# Altium PCB EVB_MBD_AK376xE_V1.0.0.PcbDoc (part 2 of 5)
Units mil, origin at the board's own origin, x right, y up, seen from the top; angles counter-clockwise.
Board outline 7060.01 x 5460.01 mil, 4 copper layers (Top, Layer 1, Layer 2, Bottom), stack 5.512 mil thick; 344 components, 305 nets, 1421 pads, 1325 vias.
Unrouted connection lines stored in the file: 947.
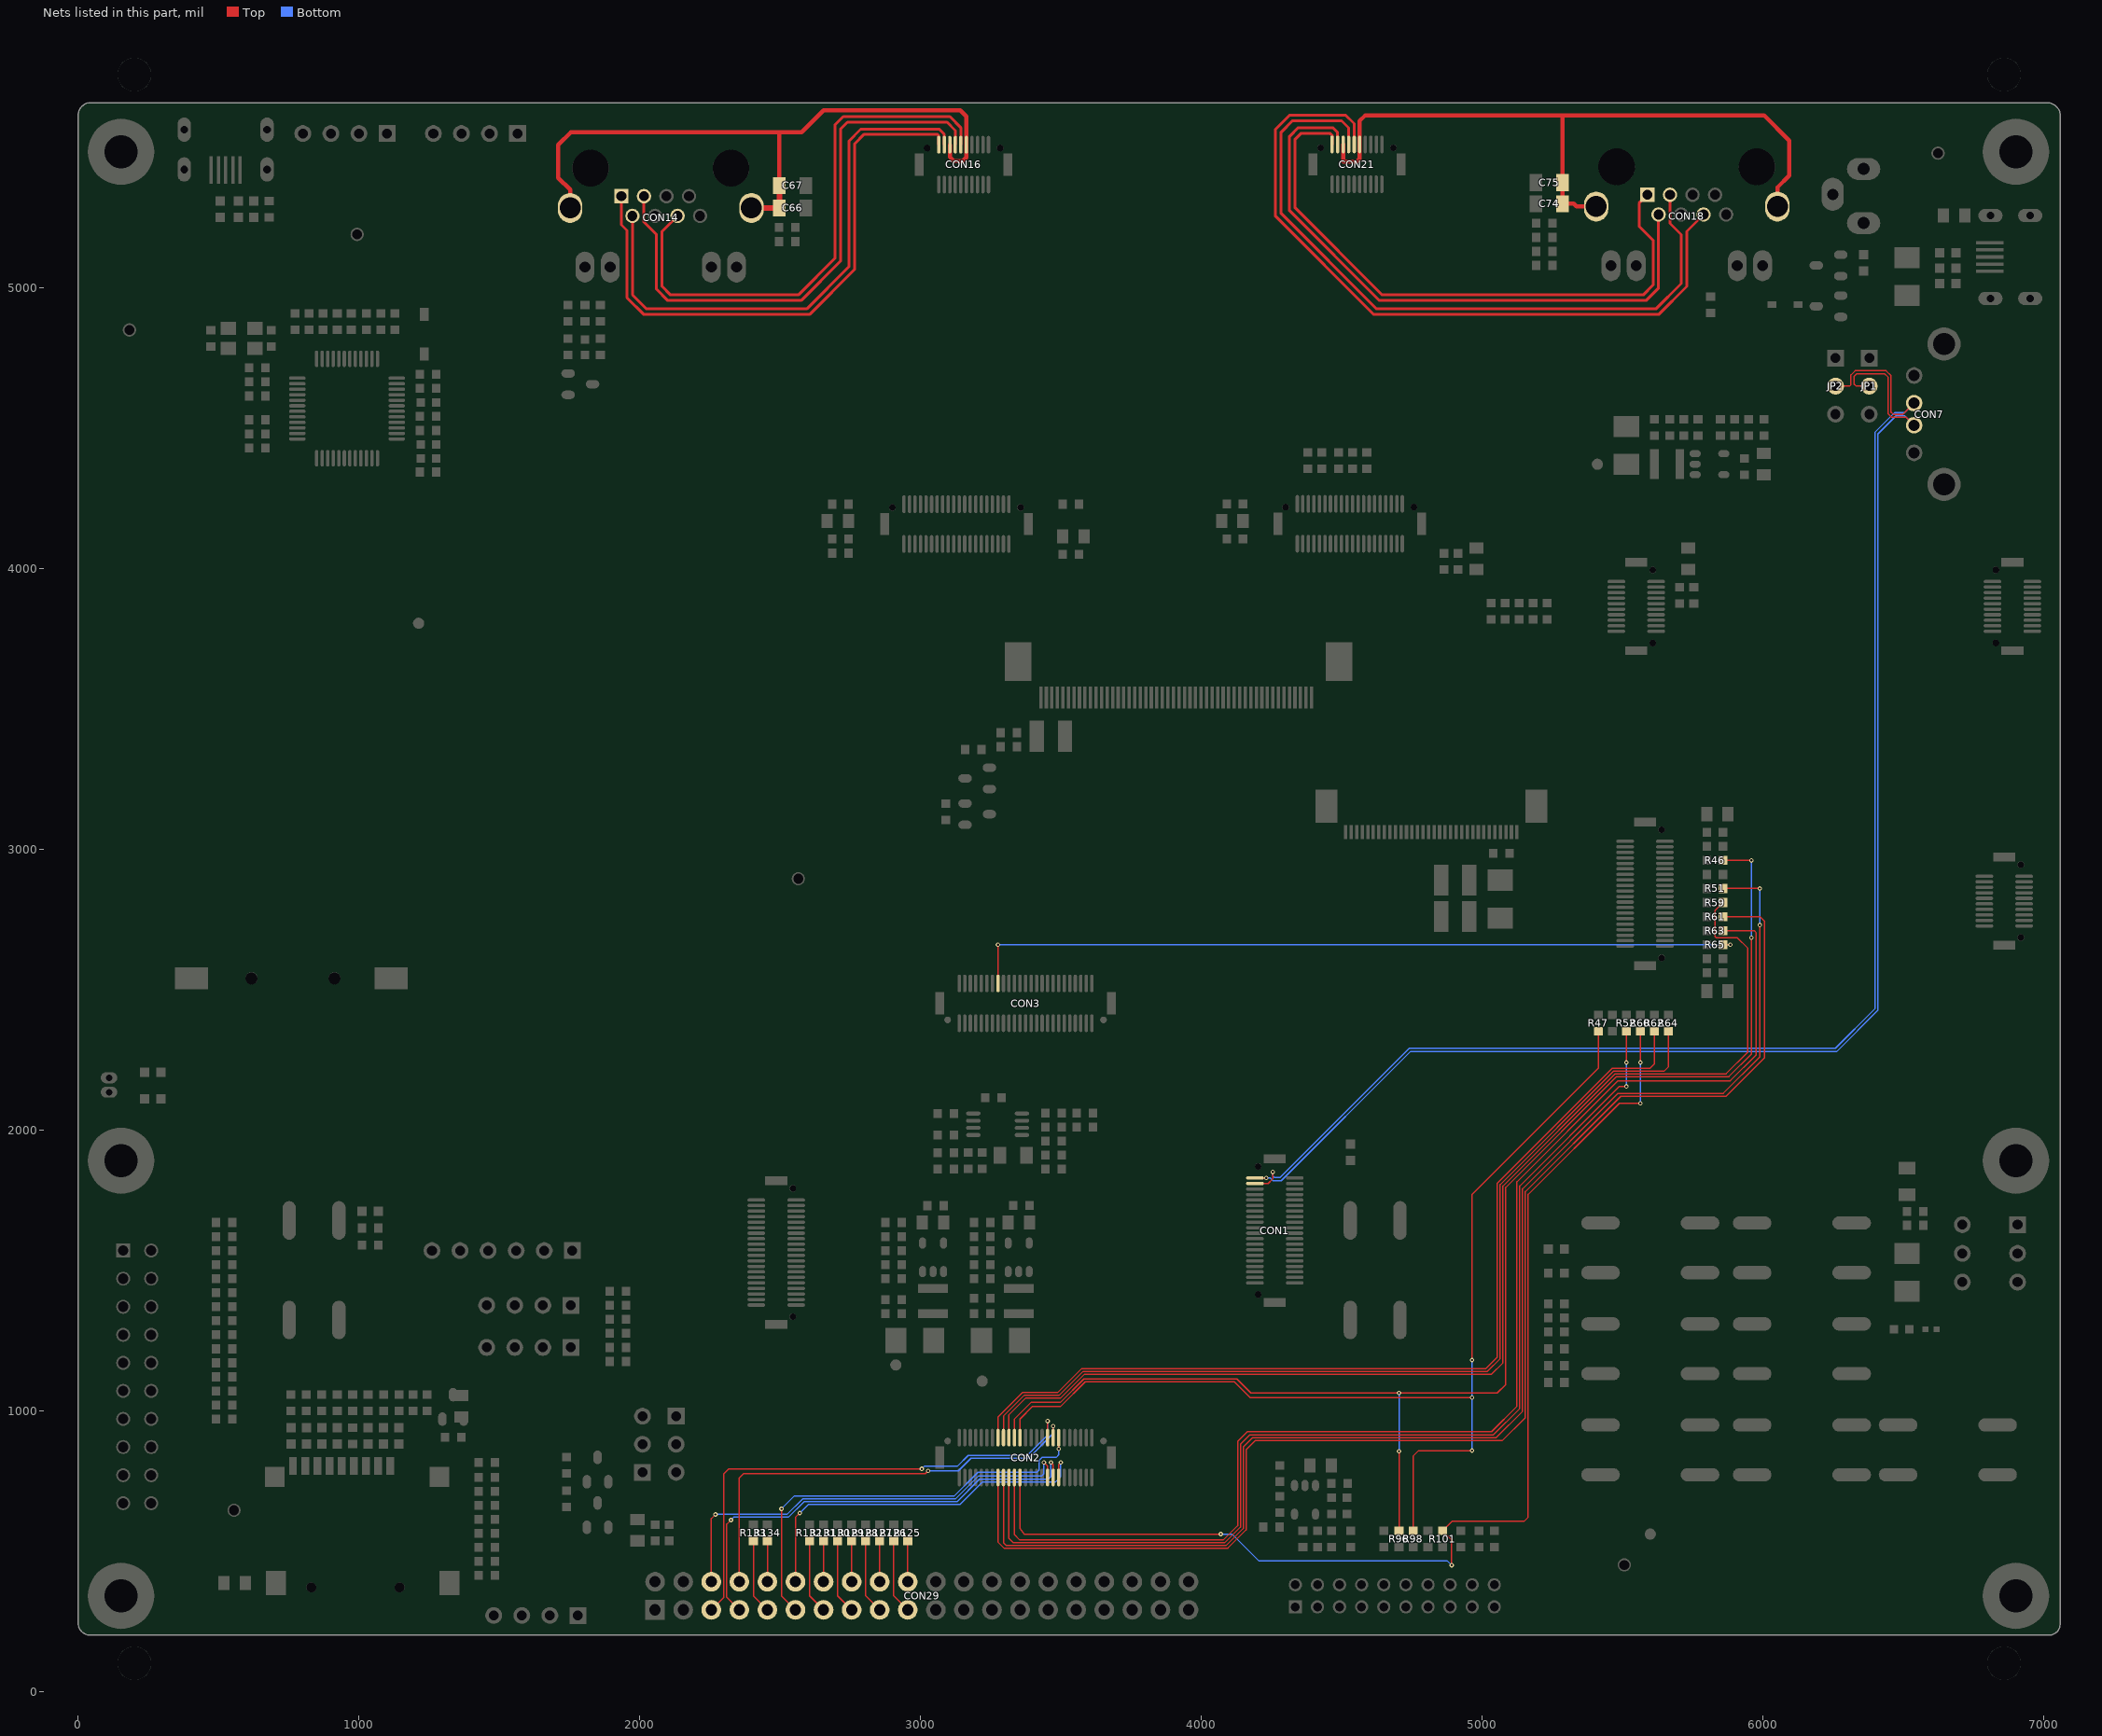
[diagram p4: the nets of this part, all layers, seen from the top]

## Footprints (in the part's own frame and the unit in brackets; to place one, negate y for a bottom-side part, rotate by r counter-clockwise, add the part's x,y. Pads: shape width x height; smd on the part's side, far side on the other; paste and mask are expansions set on the pad) (continued)
FileName=\\172.10.10.37\部门文件夹\系统平台研发中心\系统硬件部\AD_Library\\AD_Footprint.PcbLib#8 [mm]
  oval 2x3 hole 1.1 slot 1.7 at 90 deg: 1(10.9,0) 2(6,0)
  oval 3x2 hole 1 slot 1.7 at 0 deg: 3(8.3,-2.8)
  silkscreen extent 0,-2.5 10.9,2.5
FileName=\\172.10.10.37\部门文件夹\系统平台研发中心\系统硬件部\AD_Library\\AD_Footprint.PcbLib#9 [mm]
  rect 0.3x2.5 smd: 1(-1.3,-0.25) 2(-0.65,-0.25) 3(0,-0.25) 4(0.65,-0.25) 5(1.3,-0.25)
  oval 1.2x2.2 hole 0.7 slot 1.5 at 90 deg: 6(3.75,-0.3) 7(3.75,-3.9) 8(-3.75,-3.9) 9(-3.75,-0.3)
  silkscreen extent -3.8,-6.4 3.8,0
FileName=\\172.10.10.37\部门文件夹\系统平台研发中心\系统硬件部\AD_Library\\AD_Footprint.PcbLib#10 [mm]
  round 1.5 / inner round 1.5 / far side round 1.7 hole 1: 1(3.5,0) 2(1,0) 3(-1,0) 4(-3.5,0)
  round 3 hole 2: 5(-6.35,2.7) 6(6.35,2.7)
  silkscreen extent -6.3,-1.75 6.35,13
FileName=\\172.10.10.37\部门文件夹\系统平台研发中心\系统硬件部\AD_Library\\AD_Footprint.PcbLib#11 [mm]
  rect 0.7x1.6 smd: 1(3.15,11) 2(2.05,11) 3(0.95,11) 4(-0.15,11) 5(-1.25,11) 6(-2.35,11) 7(-3.45,11) 8(-4.55,11) 9(-5.65,11)
  rect 1.8x1.8 smd: 10(-7.3,10)
  rrect0% 1.8x1.8 smd: 11(7.6,10)
  rect 1.8x2.2 smd: 12(8.5,0.4) 13(-7.2,0.4)
  round 0.9 hole 0.9 unplated: 14(-4,0) 15(4,0)
  silkscreen extent -6.4,-6.3 8.3,10.5
FileName=\\172.10.10.37\部门文件夹\系统平台研发中心\系统硬件部\AD_Library\\AD_Footprint.PcbLib#12 [mm]
  oval 1x1.5 hole 0.6 slot 0.9 at 90 deg: 1(-0.65,-0.5) 2(0.65,-0.5)
  silkscreen extent -2.3,-1.7 2.2,2
FileName=\\172.10.10.37\部门文件夹\系统平台研发中心\系统硬件部\AD_Library\\AD_Footprint.PcbLib#13 [mm]
  rect 1.3x1.3 / inner round 1.3 / far side rect 1.3x1.3 hole 0.9: 1(3.56,-6.897)
  round 1.3 hole 0.9: 2(2.56,-5.117) 3(1.52,-6.897) 4(0.52,-5.117) 5(-0.52,-6.897) 6(-1.52,-5.117) 7(-2.56,-6.897) 8(-3.56,-5.117)
  oval 2.2x2.7 hole 1.9 slot 2.2 at 90 deg: 9(8.2,-5.837) 10(-8.2,-5.837)
  round 3.3 hole 3.3 unplated: 11(6.35,-9.437) 12(-6.35,-9.437)
  oval 1.7x2.8 hole 1 slot 1.5 at 90 deg: 13(6.86,-0.487) 14(4.57,-0.487) 15(-4.57,-0.487) 16(-6.86,-0.487)
  silkscreen extent -8.2,-14.94 8.2,1.06
FileName=\\172.10.10.37\部门文件夹\系统平台研发中心\系统硬件部\AD_Library\\AD_Footprint.PcbLib#14 [mm]
  oval 0.3x1.6 smd: 1(-2.25,-1.8) 2(-2.25,1.8) 3(-1.75,-1.8) 4(-1.75,1.8) 5(-1.25,-1.8) 6(-1.25,1.8) 7(-0.75,-1.8) 8(-0.75,1.8) 9(-0.25,-1.8) 10(-0.25,1.8) 11(0.25,-1.8) 12(0.25,1.8) 13(0.75,-1.8) 14(0.75,1.8) 15(1.25,-1.8) 16(1.25,1.8) 17(1.75,-1.8) 18(1.75,1.8) 19(2.25,-1.8) 20(2.25,1.8)
  rect 0.8x2 smd: 21(-4,0) 22(4,0)
  round 0.6 hole 0.6 unplated: 23(-3.3,1.5) 24(3.3,1.5)
  silkscreen extent -4.5,-2.5 4.5,1.8
FileName=\\172.10.10.37\部门文件夹\系统平台研发中心\系统硬件部\AD_Library\\AD_Footprint.PcbLib#15 [mm]
  rect 0.3x1.25 smd: 1(7.75,1) 2(7.25,1) 3(6.75,1) 4(6.25,1) 5(5.75,1) 6(5.25,1) 7(4.75,1) 8(4.25,1) 9(3.75,1) 10(3.25,1) 11(2.75,1) 12(2.25,1) 13(1.75,1) 14(1.25,1) 15(0.75,1) 16(0.25,1) 17(-0.25,1) 18(-0.75,1) 19(-1.25,1) 20(-1.75,1) 21(-2.25,1) 22(-2.75,1) 23(-3.25,1) 24(-3.75,1) 25(-4.25,1) 26(-4.75,1) 27(-5.25,1) 28(-5.75,1) 29(-6.25,1) 30(-6.75,1) 31(-7.25,1) 32(-7.75,1)
  rect 1.999x3 smd: 33(-9.5,-1.35) 34(9.5,-1.35)
  silkscreen extent -10.75,-4.2 10.8,1.75
FileName=\\172.10.10.37\部门文件夹\系统平台研发中心\系统硬件部\AD_Library\\AD_Footprint.PcbLib#16 [mm]
  rect 0.3x2 smd: 1(12.25,0) 2(11.75,0) 3(11.25,0) 4(10.75,0) 5(10.25,0) 6(9.75,0) 7(9.25,0) 8(8.75,0) 9(8.25,0) 10(7.75,0) 11(7.25,0) 12(6.75,0) 13(6.25,0) 14(5.75,0) 15(5.25,0) 16(4.75,0) 17(4.25,0) 18(3.75,0) 19(3.25,0) 20(2.75,0) 21(2.25,0) 22(1.75,0) 23(1.25,0) 24(0.75,0) 25(0.25,0) 26(-0.25,0) 27(-0.75,0) 28(-1.25,0) 29(-1.75,0) 30(-2.25,0) 31(-2.75,0) 32(-3.25,0) 33(-3.75,0) 34(-4.25,0) 35(-4.75,0) 36(-5.25,0) 37(-5.75,0) 38(-6.25,0) 39(-6.75,0) 40(-7.25,0) 41(-7.75,0) 42(-8.25,0) 43(-8.75,0) 44(-9.25,0) 45(-9.75,0) 46(-10.25,0) 47(-10.75,0) 48(-11.25,0) 49(-11.75,0) 50(-12.25,0)
  rect 2.4x3.5 smd: 51(-14.75,-3.25) 52(14.3,-3.25)
  silkscreen extent -16.25,-5.25 15.75,1.3
FileName=\\172.10.10.37\部门文件夹\系统平台研发中心\系统硬件部\AD_Library\\AD_Footprint.PcbLib#17 [mm]
  rect 1.2x1.2 / inner round 1.2 / far side rect 1.2x1.2 hole 0.8: 1(-9,-1)
  round 1.2 hole 0.8: 2(-9,1) 3(-7,-1) 4(-7,1) 5(-5,-1) 6(-5,1) 7(-3,-1) 8(-3,1) 9(-1,-1) 10(-1,1) 11(1,-1) 12(1,1) 13(3,-1) 14(3,1) 15(5,-1) 16(5,1) 17(7,-1) 18(7,1) 19(9,-1) 20(9,1)
  silkscreen extent -16,-2.5 16,2.5
FileName=\\172.10.10.37\部门文件夹\系统平台研发中心\系统硬件部\AD_Library\\AD_Footprint.PcbLib#18 [mm]
  rect 1.27x1.27 / inner rect 1.143x1.143 / far side rect 1.372x1.372 hole 0.94: 1(0,0)
  round 1.27 / inner round 1.194 / far side round 1.397 hole 0.94: 2(0,2.54) 3(2.54,0) 4(2.54,2.54) 5(5.08,0) 6(5.08,2.54) 7(7.62,0) 8(7.62,2.54) 9(10.16,0) 10(10.16,2.54) 11(12.7,0) 12(12.7,2.54) 13(15.24,0) 14(15.24,2.54) 15(17.78,0) 16(17.78,2.54) 17(20.32,0) 18(20.32,2.54) 19(22.86,0) 20(22.86,2.54)
  silkscreen extent -3.18,-3.81 26.67,6.35
FileName=\\172.10.10.37\部门文件夹\系统平台研发中心\系统硬件部\AD_Library\\AD_Footprint.PcbLib#19 [mm]
  rect 1.524x1.524 / inner round 1.524 / far side rect 1.524x1.524 hole 0.889: 1(0,0)
  round 1.524 hole 0.889: 2(2.54,0) 3(5.08,0) 4(7.62,0) 5(10.16,0) 6(12.7,0)
  silkscreen extent -1.5,-1.7 14.2,1.7
FileName=\\172.10.10.37\部门文件夹\系统平台研发中心\系统硬件部\AD_Library\\AD_Footprint.PcbLib#20 [mm]
  rect 1.524x1.524 / inner round 1.524 / far side rect 1.524x1.524 hole 0.889: 1(0,0)
  round 1.524 hole 0.889: 2(2.54,0) 3(5.08,0) 4(7.62,0)
  silkscreen extent -1.27,-1.27 8.89,1.27
FileName=\\172.10.10.37\部门文件夹\系统平台研发中心\系统硬件部\AD_Library\\AD_Footprint.PcbLib#21 [mm]
  rect 1.778x1.778 / inner round 1.778 / far side rect 1.778x1.778 hole 1.016: 1(0,0)
  round 1.778 hole 1.016: 2(0,2.54) 3(2.54,0) 4(2.54,2.54) 5(5.08,0) 6(5.08,2.54) 7(7.62,0) 8(7.62,2.54) 9(10.16,0) 10(10.16,2.54) 11(12.7,0) 12(12.7,2.54) 13(15.24,0) 14(15.24,2.54) 15(17.78,0) 16(17.78,2.54) 17(20.32,0) 18(20.32,2.54) 19(22.86,0) 20(22.86,2.54) 21(25.4,0) 22(25.4,2.54) 23(27.94,0) 24(27.94,2.54) 25(30.48,0) 26(30.48,2.54) 27(33.02,0) 28(33.02,2.54) 29(35.56,0) 30(35.56,2.54) 31(38.1,0) 32(38.1,2.54) 33(40.64,0) 34(40.64,2.54) 35(43.18,0) 36(43.18,2.54) 37(45.72,0) 38(45.72,2.54) 39(48.26,0) 40(48.26,2.54)
  silkscreen extent -2.16,-2.03 50.16,4.57
FileName=\\172.10.10.37\部门文件夹\系统平台研发中心\系统硬件部\AD_Library\\AD_Footprint.PcbLib#22 [mm]
  rect 1.524x1.524 / inner round 1.524 / far side rect 1.524x1.524 hole 0.889: 1(0,0)
  round 1.524 hole 0.889: 2(2.54,0) 3(5.08,0)
  silkscreen extent -1.27,-1.27 6.35,1.27
FileName=\\172.10.10.37\部门文件夹\系统平台研发中心\系统硬件部\AD_Library\\AD_Footprint.PcbLib#23 [mm]
  rect 0.762x0.762 smd: A(0.699,0) K(-0.699,0)
  silkscreen extent -1.46,-0.51 1.21,0.51
FileName=\\172.10.10.37\部门文件夹\系统平台研发中心\系统硬件部\AD_Library\\AD_Footprint.PcbLib#24 [mm]
  rect 0.8x0.6 smd: 1(-1.2,0) 2(1.2,0)
  silkscreen extent -1.8,-0.7 2,0.7
FileName=\\172.10.10.37\部门文件夹\系统平台研发中心\系统硬件部\AD_Library\\AD_Footprint.PcbLib#25 [mm]
  rect 1.2x0.8 smd: A(-1.8,0) K(1.8,0)
  silkscreen extent -2.6,-0.9 2.8,0.9
FileName=\\172.10.10.37\部门文件夹\系统平台研发中心\系统硬件部\AD_Library\\AD_Footprint.PcbLib#26 [mm]
  rect 0.838x0.838 smd: 1(-0.737,0) 2(0.737,0)
  silkscreen extent -1.45,-0.69 1.45,0.69
FileName=\\172.10.10.37\部门文件夹\系统平台研发中心\系统硬件部\AD_Library\\AD_Footprint.PcbLib#27 [mm]
  rect 1.016x1.27 smd: 1(-0.965,0) 2(0.965,0)
  silkscreen extent -1.8,-0.86 1.8,0.86
FileName=\\172.10.10.37\部门文件夹\系统平台研发中心\系统硬件部\AD_Library\\AD_Footprint.PcbLib#28 [mm]
  oval 3.5x1.2 smd: 1(-4.5,-2.25) 2(-4.5,2.25) 3(4.5,2.25) 4(4.5,-2.25)
  silkscreen extent -3,-3 3,3
FileName=\\172.10.10.37\部门文件夹\系统平台研发中心\系统硬件部\AD_Library\\AD_Footprint.PcbLib#29 [mm]
  rect 0.8x2.7 smd: 1(-1.15,0) 2(1.15,0)
  silkscreen extent -1.5,-1.5 1.5,1.5
FileName=\\172.10.10.37\部门文件夹\系统平台研发中心\系统硬件部\AD_Library\\AD_Footprint.PcbLib#30 [mm]
  oval 0.762x1.219 smd: D(0,1.105) G(-0.965,-1.105) S(0.965,-1.105)
  silkscreen extent -1.6,-1.91 1.6,1.91
FileName=\\172.10.10.37\部门文件夹\系统平台研发中心\系统硬件部\AD_Library\\AD_Footprint.PcbLib#31 [mm]
  oval 0.762x1.219 smd: B(-0.965,-1.105) C(0,1.105) E(0.965,-1.105)
  silkscreen extent -1.6,-1.91 1.6,1.91
FileName=\\172.10.10.37\部门文件夹\系统平台研发中心\系统硬件部\AD_Library\\AD_Footprint.PcbLib#32 [mm]
  rect 0.559x0.508 smd: 1(-0.508,0) 2(0.508,0)
  silkscreen extent -0.98,-0.47 0.98,0.47
FileName=\\172.10.10.37\部门文件夹\系统平台研发中心\系统硬件部\AD_Library\\AD_Footprint.PcbLib#33 [mm]
  rect 1.524x1.524 / inner round 1.524 / far side rect 1.524x1.524 hole 0.889: 1(-2.6,2.5)
  round 1.524 hole 0.889: 2(0,2.5) 3(2.6,2.5) 4(-2.6,-2.5) 5(0,-2.5) 6(2.6,-2.5)
  silkscreen extent -4,-6.1 4.5,6
FileName=\\172.10.10.37\部门文件夹\系统平台研发中心\系统硬件部\AD_Library\\AD_Footprint.PcbLib#34 [mm]
  round 1.2 hole 0.9: 1(0,0)
  silkscreen extent -0.76,-0.76 0.76,0.76
FileName=\\172.10.10.37\部门文件夹\系统平台研发中心\系统硬件部\AD_Library\\AD_Footprint.PcbLib#35 [mm]
  oval 0.635x1.016 smd: 1(-0.95,-1.27) 2(0,-1.27) 3(0.95,-1.27) 4(0.95,1.32) 5(-0.95,1.32)
  silkscreen extent -1.65,-2.13 1.5,2
FileName=\\172.10.10.37\部门文件夹\系统平台研发中心\系统硬件部\AD_Library\\AD_Footprint.PcbLib#36 [mm]
  oval 1.5x0.3 smd: 1(-4.5,2.75) 2(-4.5,2.25) 3(-4.5,1.75) 4(-4.5,1.25) 5(-4.5,0.75) 6(-4.5,0.25) 7(-4.5,-0.25) 8(-4.5,-0.75) 9(-4.5,-1.25) 10(-4.5,-1.75) 11(-4.5,-2.25) 12(-4.5,-2.75) 25(4.5,-2.75) 26(4.5,-2.25) 27(4.5,-1.75) 28(4.5,-1.25) 29(4.5,-0.75) 30(4.5,-0.25) 31(4.5,0.25) 32(4.5,0.75) 33(4.5,1.25) 34(4.5,1.75) 35(4.5,2.25) 36(4.5,2.75)
  oval 0.3x1.5 smd: 13(-2.75,-4.5) 14(-2.25,-4.5) 15(-1.75,-4.5) 16(-1.25,-4.5) 17(-0.75,-4.5) 18(-0.25,-4.5) 19(0.25,-4.5) 20(0.75,-4.5) 21(1.25,-4.5) 22(1.75,-4.5) 23(2.25,-4.5) 24(2.75,-4.5) 37(2.75,4.5) 38(2.25,4.5) 39(1.75,4.5) 40(1.25,4.5) 41(0.75,4.5) 42(0.25,4.5) 43(-0.25,4.5) 44(-0.75,4.5) 45(-1.25,4.5) 46(-1.75,4.5) 47(-2.25,4.5) 48(-2.75,4.5)
  silkscreen extent -4.75,-3.5 3.5,4.75
FileName=\\172.10.10.37\部门文件夹\系统平台研发中心\系统硬件部\AD_Library\\AD_Footprint.PcbLib#37 [mm]
  oval 1.3x0.35 smd: 1(-2.2,0.975) 2(-2.2,0.325) 3(-2.2,-0.325) 4(-2.2,-0.975) 5(2.2,-0.975) 6(2.2,-0.325) 7(2.2,0.325) 8(2.2,0.975)
  silkscreen extent -1.3,-1.5 1.3,1.5
FileName=\\172.10.10.37\部门文件夹\系统平台研发中心\系统硬件部\AD_Library\\AD_Footprint.PcbLib#38 [mm]
  round 1.016 smd: 1(0,0)
  silkscreen extent -0.63,-0.63 0.64,0.63
FileName=\\172.10.10.37\部门文件夹\系统平台研发中心\系统硬件部\AD_Library\AD_Footprint.PcbLib#1 [mil]
  silkscreen extent -289,-28 284,59
FileName=\\172.10.10.37\部门文件夹\系统平台研发中心\系统硬件部\AD_Library\AD_Footprint.PcbLib#2 [mil]
  round 40 smd: 1(0,0)
  Top keep-out region: 40,0 36.96,15.31 28.28,28.28 15.31,36.96 0,40 0,40 -15.31,36.96 -28.28,28.28 -36.96,15.31 -40,0 -40,0 -36.96,-15.31 -28.28,-28.28 -15.31,-36.96 0,-40 0,-40 15.31,-36.96 28.28,-28.28 36.96,-15.31 40,0
HOLE3MM [mil]
  round 120 hole 120 unplated: 1(0,0)
SCREWING_H_3MMA [mm]
  round 6 hole 3: 1(0,0)
Y_3MM2X2MM5 [mm]
  rect 1.4x1.2 smd: 1(-1.2,-0.9) 2(1.2,-0.9) 3(1.2,0.9) 4(-1.2,0.9)
  silkscreen extent -2.2,-1.8 1.7,1.3

## Part data
BT1: library part CNBAF0000XX, "CR1220-2，SMD 3V纽扣电池座子，棕色", Part Number_AK=CNBAF0200XX, Catalog=Connector, Part Number=CNBAF0000XX, PCB DECAL=BAT_CR1220, SOURCE_PATH="D:\PROGRAM FILES\ORCAD\ORCAD_10.5\TOOLS\CAPTURE\LIBRARY\DISCRETE.OLB"
C1 C3 C8 C10 C14 C17 C21 C23 C25 C27 C34 C35 C37 C38 C40 C41 C42 C43 C45 C46 C47 C49 C55 C70 C77 C79 C81 C84: library part CC0301040XX, "C/C,100nF,25V,+/-5%,0603", Catalog=陶瓷电容, Part Number=CC0301040XX
  C1 C3 C10 C17 C23: Part Number_AK=CC0301040XX, PCB DECAL=C0603
  C8 C14 C21 C25: Part Number_AK=CC0301040XX, PCB DECAL=C0603, Remark=NC
  C35: Remark=NC
C2 C5 C11 C16 C18 C87: library part TC2802271XX, "T/C,220uF,6.3V,+/-5%,3528", Catalog=钽电容, Part Number=TC2802271XX, PCB DECAL=C3528_PN
C4 C9 C15 C22 C26 C58 C60 C62 C64 C68 C71 C72 C82 C83 C85 C86: library part CC0304750XX, "C/C,4.7uF,25V,+/-5%,0603", Catalog=陶瓷电容, Part Number=CC0304750XX
  C86: Remark=NC
C6 C12 C19: library part CC0301000XX, "C/C,10pF,25V,+/-5%,0603", Catalog=陶瓷电容, Part Number=CC0301000XX
C7 C13 C20 C24 C28 C36 C39 C44 C50 C56 C59 C61 C63 C65 C69 C73 C88: library part CC0301060XX, "C/C,10uF,25V,+/-5%,0603", Catalog=陶瓷电容, Part Number=CC0301060XX
C48 C89: library part CC0301055XX, "C/C,1uF,16V,+/-10%,0603", Catalog=陶瓷电容, Part Number=CC0301055XX
C51 C54: library part CC0301800XX, "C/C,18pF,25V,+/-5%,0603", Catalog=陶瓷电容, Part Number=CC0301800XX
C52 C53: library part CC0301020XX, "C/C,1nF,25V,+/-5%,0603", Catalog=陶瓷电容, Part Number=CC0301020XX
C57: library part CC0602260XX, "C/C,22uF,10V,+/-5%,1206", Catalog=陶瓷电容, Part Number=CC0602260XX
C66 C67 C74 C75: library part CC0601021XX, "C/C,1nF,2KV,+/-10%,1206", Catalog=陶瓷电容, Part Number=CC0601021XX
C76 C78 C80: library part CC1004760XX, "C/C,47uF,10V,+/-10%,1210", Catalog=陶瓷电容, Part Number=CC1004760XX
CON1 CON4 CON12 CON13 CON17: library part CNBBF4000XX, "Connector 0.5mm ，BTB2*20Pin，SMT，母座，H3.0，DF12#(3.0)-40DP-0.5;", Catalog=Connector, Part Number=CNBBF4000XX
CON2 CON3: library part CNBBF5000XX, "Connector： 0.5mm ，BTB2*25Pin，SMT，母座，H3.0，DF12#(3.0)-50DP-0.5;", Catalog=Connector, Part Number=CNBBF5000XX
CON5: library part CNDCF0302XX, "小DC电源插座座,DS-002,电源插座3.5-1.3mm，3PIN", Catalog=Connector, Part Number=CNDCF0302XX, PCB DECAL=CNDCF0302
CON6 CON10: library part CNUSM0500XX, "Micro USB, B type 5Pin/F SMT", Part Number_AK=CNUSF0900XX, Catalog=Connector, Part Number=CNUSM0500XX, PCB DECAL=USB_MICRO_5P/F_SMT
CON7: library part CNUSF0502XX, "USB-1400-DIP,90 degrees", Catalog=Connector, Part Number=CNUSF0502XX, PCB DECAL=USB-1400-DIP
CON9: library part CNCJF1300XX, "TF CARD Connector,13PADS,外焊型 CKT01-009DM", Catalog=Connector, Part Number=CNCJF1300XX, PCB DECAL=TFCARD_AK98XX_PLATFORM, SOURCE_PATH=E:\工作目录\ORCAD原理图库\ORCAD元件库\SD卡&TF卡&4合1PUSH卡.OLB
CON11: library part CNWAM0202XX, "WaferConnector,Male,leyconn,605-0P-S130-02P,1.25mm,2pin", Catalog=Connector, Part Number=CNWAM0202XX
CON14 CON18: library part CNXXF1200XX, "NetConnector,06-05-10-05-02,6.5mmX16.5mm,2-LED,12pin", Catalog=Connector, Part Number=CNXXF1200XX, Part_RNEfNErNEncNE=NJB701, PCB DECAL=RJ45-8_PTH, ROOM=ethernet, SOURCE_PATH=E:\PROJECTFILES\CADENCE\WINCE\VER1\EPC_AK7801_V1.DSN
CON15 CON16 CON19 CON20 CON21: library part CNBBF2000XX, "Connector 0.5mm ，BTB2*10Pin，SMT，母座，H3.0，DF12#(3.0)-20DP-0.5;", Catalog=Connector, Part Number=CNBBF2000XX, PCB DECAL=CON10X2_0MM5_BTB_DF12_BOTTOM
CON22: library part CNFPF3201XX, "FPC连接器，32P，0.5mm，翻盖式，下接，H=2mm", Catalog=Connector, Part Number=CNFPF3201XX, PCB DECAL=CON32_0MM5
CON23: library part CNFPF5001XX, "连接器 FPC连接器，50P，0.5mm，翻盖式，H=2mm", Catalog=Connector, Part Number=CNFPF5001XX, PCB DECAL=CON50_0MM5, ROOM=lcd1, Source Path=D:\MAGIC\SCHEMATICS\MAGIC_DAUGHTERBD_EVT_V1.DSN
CON24: library part CNHEF2001XX, "Header,Female,CON10X2,2.0mm,20pin,排母", Catalog=Connector, Part Number=CNHEF2001XX, PCB DECAL=CON10X2_2MM, SOURCE_PATH=E:\工作目录\ORCAD原理图库\ORCAD元件库\CONNECTOR.OLB
CON25: library part CNHEM2000XX, "Header,2X10pin,2.54mm,Male,排针", Catalog=Connector, Part Number=CNHEM2000XX, PCB DECAL=JTAG_TRACE20_2MM54_MALE, Remark=NC, SOURCE_PATH=E:\工作目录\ORCAD原理图库\ORCAD元件库\CONNECTOR.OLB
CON26: library part CNHEM0600XX, "Header,Male,CON1X6,2.54mm,6pin，排针", Catalog=Connector, Part Number=CNHEM0600XX, Remark=NC
CON27 CON28 CON31 CON32 CON33: library part CNHEM0400XX, "Header,1X4pin,2.54mm,Male，排针", Catalog=Connector, Part Number=CNHEM0400XX
  CON27 CON28 CON31 CON32: Remark=NC
CON29: library part CNHEF4601XX, "CON2*20&2X1X3,2.54mm,Female，排母", Catalog=Connector, Part Number=CNHEF4601XX, PCB DECAL=CON20X2_2MM54
CON30: library part CNHEF0300XX, "Header,1X3pin,2.54mm,Female，排母", Catalog=Connector, Part Number=CNHEF0300XX
D1 D4: library part LE03RXX00XX, "REDLED,0603", Catalog=二极管, Part Number=LE03RXX00XX
D2: library part DD33ZEN68XX, "Zener Diode,UDZS6.8B,6.8V,S0D-323", Catalog=稳压管, Part Number=DD33ZEN68XX
D3: library part DD32SCH00XX, "Schottky barrier,RB160M-40,SOD-123", Catalog=二极管, Part Number=DD32SCH00XX
D5: library part LE03YXX00XX, "YELLOW,LED0603", Part Number=LE03YXX00XX
D6: library part LE03GXX00XX, "GREENLED,0603", Catalog=二极管, Part Number=LE03GXX00XX
D7: library part LE03BXX00XX, "BULELED,0603", Catalog=二极管, Part Number=LE03BXX00XX
E1 E2 E3 E4 E5 E6 E7 E8 E9 E10 E11 E12 E13 E14 E15 E16 E19 E20 E25: library part ED0314000XX, "PESD1608H140CR15GPT,0603", Catalog="ESD Protectors", Part Number=ED0314000XX, PCB DECAL=ESD0603, ROOM=power, SOURCE_PATH=F:\PROJECTFILES\CADENCE\AK9802PLATFORM\AK98XX_MB_V0-0715.DSN
  E15 E16 E19 E20 E25: Remark=NC
F1: library part SNSMDTS05XX, "保险丝，Littelfuse，0437001.WRA，1A ,1206", Catalog=保险丝, Part Number=SNSMDTS05XX, PCB DECAL=FUSE1206, Source Path=D:\CADENCE\SPB_16.2\TOOLS\CAPTURE\LIBRARY\DISCRETE.OLB
FB1 FB2 FB3 FB4 FB5 FB6 FB8 FB15 FB16 FB18 FB19 FB20 FB22 FB23 FB28: library part BE0503010XX, "BEAD,PZ2012U301-1R5TF,300R,100MHz,0805", Catalog=贴片磁珠, Part Number=BE0503010XX, Part Number_AK=BE0503010XX, PCB DECAL=FB0805
  FB6: Remark=NC
FB9 FB10 FB11 FB12 FB13 FB14 FB17 FB21 FB25 FB26 FB27: library part BE0306011XX, "BLM18BD601SN1, 600R@100MHz", Package=L0603, Catalog=贴片磁珠, Part Number=BE0306011XX, PCB DECAL=FB0603, SOURCE_PATH="D:\PROGRAM FILES\ORCAD\ORCAD_10.5\TOOLS\CAPTURE\LIBRARY\DISCRETE.OLB"
JP1 JP2 JP5: library part CNHEM0300XX, "Header,1X3pin,2.54mm,Male，排针", Catalog=Connector, Part Number=CNHEM0300XX
K1 K2 K3 K4 K5 K6 K7 K8 K9: library part SWKS04001XX, Catalog=开关, Part Number=SWKS04001XX, Part Number_AK=SWKS04001XX, PCB DECAL=KEY_4P_SMD_6X6MM
L1 L2 L3: library part WL1C04R70XX, Part Number_AK=WL1C02R20XX, Catalog=贴片电感, Part Number=WL1C04R70XX, PCB DECAL=L_SWPA3012_3X3MM, SOURCE_PATH=E:\工作目录\ORCAD原理图库\ORCAD元件库\磁珠&电感.OLB
Q1 Q2 Q3 Q7 Q8: library part MS052SW02XX, "AO3415-sot23,E-P-CH,GP", Catalog=MOS, Part Number=MS052SW02XX, PCB DECAL=AO3413_SOT23_GDS_P
Q4 Q6: library part TR05NGN00XX, "2N3904/PMBT3904,SOT-23,NPN,GP", Catalog=三极管, Part Number=TR05NGN00XX, PCB DECAL=2N3904/PMBT3904_SOT23_BCE_NPN
Q5: library part JCSXTPW62XX, "NMOS,20V,±8V,6.5A,<34mΩ,VGS(th)>1V,SOT-23,AO3416.", Catalog=MOS, Part Number=JCSXTPW62XX, PCB DECAL=AO3413_SOT23_GDS_P
R1 R5 R12: library part CR0304720XX, "Res,4.7K,1/10W,+/-5%,0603", Catalog=贴片电阻, Part Number=CR0304720XX
R2: library part CR0350030XX, "Res,500K,1/10W,+/-1%,0603", Part Number=CR0350030XX
R3 R8 R23 R122 R140: library part CR0310030XX, "Res,100K,1/10W,+/-1%,0603", Catalog=贴片电阻, Part Number=CR0310030XX
R4: library part CR0201020XX, "Res,1K,1/16W,+/-5%,0402", Catalog=贴片电阻, Part Number=CR0201020XX
R6 R9: library part CR0354930XX, "Res,549K,1/10W,+/-1%,0603", Catalog=贴片电阻, Part Number=CR0354930XX
R7 R11: library part CR0312030XX, "Res,120K,1/10W,+/-1%,0603", Catalog=贴片电阻, Part Number=CR0312030XX
R10: library part CR0305110XX, "Res,510R,1/10W,+/-5%,0603", Catalog=贴片电阻, Part Number=CR0305110XX
R13 R14 R15 R16 R17 R18 R19 R29 R87 R88 R89 R90 R106 R107 R108 R124 R141 R142: library part CR0310020XX, "Res,10K,1/10W,+/-1%,0603", Catalog=贴片电阻, Part Number=CR0310020XX
  R13 R14 R15 R17 R18 R19 R87 R88 R89 R90 R106 R107: Remark=NC
R20 R21 R22 R24 R25 R26 R28 R91 R93 R95 R97 R100 R102: library part CR0302200XX, "Res,22R,1/10W,+/-5%,0603", Catalog=贴片电阻, Part Number=CR0302200XX
R27 R31 R33 R34 R35 R86 R143: library part CR0301020XX, "Res,1K,1/10W,+/-5%,0603", Catalog=贴片电阻, Part Number=CR0301020XX
R30 R68: library part CR0333R00XX, "Res,33R,1/10W,+/-1%,0603", Catalog=贴片电阻, Part Number=CR0333R00XX
R32: library part CR0312020XX, "Res,12K,1/10W,+/-1%,0603", Catalog=贴片电阻, Part Number=CR0312020XX
R36 R37 R46 R47 R48 R49 R51 R52 R59 R60 R61 R62 R63 R64 R65 R69 R70 R71 R74 R75 R77 R78 R79 R80 R92 R94 R96 R98 R99 R101 R103 R104 R105 R111 R112 R113 R117 R118 R119 R125 R126 R127 R128 R129 R130 R131 R132 R133 R134: library part CR0300000XX, "Res,0R,1/10W,+/-5%,0603", Catalog=贴片电阻, Part Number=CR0300000XX
  R125 R126 R127 R128 R130 R131 R132 R133 R134: Remark=NC
R50 R58 R76 R81 R85: library part CR0302211XX, "Res,220R,1/10W,+/-1%,0603", Catalog=贴片电阻, Part Number=CR0302211XX
R66 R67 R83 R84: library part CR0307500XX, "Res,75R,1/10W,+/-5%,0603", Catalog=贴片电阻, Part Number=CR0307500XX
R116: library part CR0304R70XX, "Res,4.7R,1/10W,+/-5%,0603", Catalog=贴片电阻, Part Number=CR0304R70XX
R123: library part CR0310040XX, "Res,1M,1/10W,+/-1%,0603", Catalog=贴片电阻, Part Number=CR0310040XX
R135: library part CR0302221XX, "Res,2.2K,1/10W,+/-1%,0603", Catalog=贴片电阻, Part Number=CR0302221XX
R136: library part CR0333010XX, "Res,3.3K,1/10W,+/-1%,0603", Catalog=贴片电阻, Part Number=CR0333010XX
R137: library part CR0347010XX, "Res,4.7K,1/10W,+/-1%,0603", Catalog=贴片电阻, Part Number=CR0347010XX
R138: library part CR0308221XX, "Res,8.2K,1/10W,+/-1%,0603", Catalog=贴片电阻, Part Number=CR0308221XX
R139: library part CR0320020XX, "Res,20K,1/10W,+/-1%,0603", Catalog=贴片电阻, Part Number=CR0320020XX
SW1: library part SWPB06000XX, "PSB-2201,6pin ,Lockable", Catalog=开关, Part Number=SWPB06000XX
TP1 TP2 TP4 TP5 TP6 TP7: library part PLDIPTP00XX, "塑料外壳 TestPin,RuiGu,TE-1,hole in PCB:Ф0.9-1.0", Catalog=塑料外壳, Part Number=PLDIPTP00XX, Remark=NC
U1 U2 U3: library part JCSXTPW60XX, "PowerIC,PAM,PAM2312AABADJ,SOT23,5pin", Manufacturer #1=XICOR, Catalog=集成电路, Part Number=JCSXTPW60XX, PCB DECAL=PAM2312_SOT23-5, Sim.Analog.Order=Model$
U4: library part JCSXTPW61XX, "PowerIC,Leadchip,LC1463CB5ATR18 ,SOT23,5pin", BOM_Footprint=SOT23-5, Catalog=集成电路, Part Number=JCSXTPW61XX, PCB DECAL=LC1463CB5ATR15_SOT23-5, PCB_DECAL=XC6228D332VR_SOT23-5, SOURCE_PATH=E:\PCB\ANYKA\AK3918E_SC1035\V200\V201\SCH\AK3918E_V201.DSN
U6: library part JCQFPIX00XX, "InterfaceIC,FTDI Chip,FT232HL,48pin,LQFP", Catalog=集成电路, Part Number=JCQFPIX00XX, PCB DECAL=FT232HL_QFP48_0MM5_9X9MM
U7: library part JCSXPAP01XX, "Power Amp,TCS,TCS7191E_SOP8_0MM65_3X5MM", Catalog=集成电路, Part Number=JCSXPAP01XX, Part Number_AK=JCSXPAP01XX, PCB DECAL=PJ145_SOP8_0MM65_3X5MM
Y1: library part XR0012MS1XX, "QR3O12M0000S2012RO,12.000MHz, 12pF,20ppm,3.2mm*2.5mm", Part Number=XR0012MS1XX, PCB DECAL=Y_3MM2X2MM5
VCC_3V6 VDD_3V3 WIFI_3V3: PCB DECAL=TP40

## Via types
v1: diameter 15.75, hole 7.87, Top to Bottom, 1261 vias
v2: diameter 24, hole 16, Top to Bottom, 43 vias
v3: diameter 20, hole 12, Top to Bottom, 21 vias

## Nets (pads, with @x,y where several pads share a name; then routed paths per layer and width w, separated by ;. In a path a pad name is that pad's centre, name@x,y a point inside that pad or via, vN(x,y) a via of type N, cw(c..) or ccw(c..) an arc to the next point about the centre after c; other vN are vias at no path point)
AK_DM: CON1.40 CON7.2 JP1.2 | length 5152.3
  Top w5: CON1.40@4191.63,1828.76 v1(4232.5,1828.76) ; JP1.2@6380,4650 6333.5,4650 6326,4657.5 6326,4685 6335,4694 6435,4694 6446.5,4682.5 6446.5,4552.5 6460,4539 6511.63,4539 CON7.2@6540,4510.63
  Bottom w5: v1(4232.5,1828.76) 4246.24,1828.76 4256,1819 4285,1819 4746,2280 6265,2280 6411,2426 6411,4479.5 6475.5,4544 6506.63,4544 CON7.2@6540,4510.63
AK_DP: CON1.38 CON7.3 JP2.2 | length 5221.7
  Top w5: CON1.38@4191.63,1809.07 4239.07,1809.07 4255,1825 v1(4255,1850) ; JP2.2@6260,4650 6310,4650 6315,4655 6315,4690 6330,4705 6440,4705 6457.5,4687.5 6457.5,4557.5 6465,4550 6500.63,4550 CON7.3@6540,4589.37
  Bottom w5: v1(4255,1850) 4255,1837 4262,1830 4280,1830 4741,2291 6259.5,2291 6400,2431.5 6400,4485 6470,4555 6505.63,4555 CON7.3@6540,4589.37
CSI0_D0: CON29.13 R132.1 | length 266.7
  Top w5: R132.1@2605,536 2605,340 CON29.13@2655,290
CSI0_D1: CON29.14 R131.1 | length 146
  Top w5: CON29.14@2655,390 R131.1@2655,536
CSI0_D2: CON29.15 R130.1 | length 266.7
  Top w5: R130.1@2705,536 2705,340 CON29.15@2755,290
CSI0_D3: CON29.16 R129.1 | length 146
  Top w5: CON29.16@2755,390 R129.1@2755,536
CSI0_D4: CON29.17 R128.1 | length 266.7
  Top w5: R128.1@2805,536 2805,340 CON29.17@2855,290
CSI0_D5: CON29.18 R127.1 | length 146
  Top w5: CON29.18@2855,390 R127.1@2855,536
CSI0_D6: CON29.19 R126.1 | length 266.7
  Top w5: R126.1@2905,536 2905,340 CON29.19@2955,290
CSI0_D7: CON29.20 R125.1 | length 146
  Top w5: CON29.20@2955,390 R125.1@2955,536
CSI0_HSYNC: CON29.10 R134.1 | length 146
  Top w5: CON29.10@2455,390 R134.1@2455,536
CSI0_I2C_SCL: CON2.36 CON29.8 | length 1622
  Top w5: CON29.8@2355,390 2355,760 2370,775 3017.5,775 v1(3027.5,785) ; v1(3472.9,945) CON2.36@3472.93,903.37
  Bottom w5: v1(3027.5,785) 3135,785 3180,830 3385,830 3472.9,917.9 v1(3472.9,945)
CSI0_I2C_SDA: CON2.35 CON29.7 | length 1655.7
  Top w5: v1(2325,610) 2310,595 2310,335 CON29.7@2355,290 ; v1(3465,815) 3472.93,807.07 CON2.35@3472.93,761.63
  Bottom w5: v1(2325,610) 2335,620 2530,620 2585,675 3130,675 3210,755 3455,755 3465,765 v1(3465,815)
CSI0_PCLK: CON2.38 CON29.11 | length 1529.4
  Top w5: v1(2505,650) 2505,340 CON29.11@2555,290 ; v1(3492.62,863) CON2.38@3492.62,903.37
  Bottom w5: v1(2505,650) 2550,695 3120,695 3205,780 3415,780 3422.5,787.5 3422.5,822.5 3433,833 3483,833 3492.62,842.62 v1(3492.62,863)
CSI0_PDWN: CON2.33 CON29.6 | length 1575.1
  Top w5: CON29.6@2255,390 2255,615 v1(2270,630) ; v1(3440,815) 3453.25,801.75 CON2.33@3453.25,761.63
  Bottom w5: v1(2270,630) 2525,630 2580,685 3125,685 3207.5,767.5 3432.5,767.5 3440,775 v1(3440,815)
CSI0_REST: CON2.34 CON29.5 | length 1822.5
  Top w5: CON29.5@2255,290 2300,335 2300,775 2317.5,792.5 v1(3005,792.5) ; CON2.34@3453.25,903.37 v1(3453.25,962.5)
  Bottom w5: v1(3005,792.5) 3015,802.5 3132.5,802.5 3170,840 3380,840 3453.25,913.25 v1(3453.25,962.5)
CSI0_SCLK: CON2.37 CON29.12 | length 1341.5
  Top w5: CON29.12@2555,390 2555,620 v1(2570,635) ; CON2.37@3492.62,761.63 3492.62,807.62 v1(3500,815)
  Bottom w5: v1(2570,635) 2600,665 3140,665 3220,745 3480,745 3500,765 v1(3500,815)
CSI0_VSYNC: CON29.9 R133.1 | length 266.7
  Top w5: R133.1@2405,536 2405,340 CON29.9@2455,290
EARTH0: C66.2 C67.2 CON14.9 CON14.10 CON16.6 CON16.12 | length 2386.7
  Top w15: CON14.9@1752.17,5284.82 1752.17,5350 1710,5392.17 1710,5510 1755,5555 2497.5,5555 ; C67.2@2497.5,5365 2497.5,5555 ; CON16.6@3104.69,5510 3104.69,5466.26 3119.69,5451.26 3150,5451.26 3163.74,5465 CON16.12@3163.74,5510 3163.74,5611.26 3142.5,5632.5 2655,5632.5 2577.5,5555 2497.5,5555
  Top w20: CON14.10@2397.84,5284.82 C66.2@2497.5,5284.82 C67.2@2497.5,5365
EARTH1: C74.2 C75.2 CON18.9 CON18.10 CON21.6 CON21.12 | length 2526.3
  Top w15: CON21.6@4505.95,5511.03 4505.94,5450 4555,5450 4565,5460 CON21.12@4565,5511.03 4565,5595 4585,5615 5287.5,5615 ; CON18.9@5407.17,5289.82 5337.5,5289.82 5327.32,5300 C74.2@5287.5,5300 C75.2@5287.5,5375 5287.5,5615 ; CON18.10@6052.84,5289.82 6052.84,5357.84 6095,5400 6095,5525 6005,5615 5287.5,5615
EMMC_CLK: CON2.21 R63.2 | length 4770.4
  Top w5: CON2.21@3335.14,761.63 3335.14,557.36 3352.5,540 4080,540 4130,590 4130,890 4165,925 5035,925 5125,1015 5125,1815 5485,2175 5885,2175 5977.5,2267.5 5977.5,2702.5 5970,2710 R63.2@5859,2710
EMMC_CMD: CON2.18 R64.1 | length 3451.2
  Top w5: CON2.18@3295.77,903.37 3295.77,980.77 3370,1055 3495,1055 3580,1140 5020,1140 5065,1185 5065,1805 5470,2210 5650,2210 5665,2225 R64.1@5665,2351
EMMC_D0/I2S0_BCLK: CON2.24 R47.1 R98.2 | length 3919.2
  Top w5: CON2.24@3354.82,903.37 3354.82,934.86 3354.88,970 3399.88,1015 3500,1015 3587.5,1102.5 4118.5,1102.5 4175,1046 v1(4965,1046) ; R98.2@4755,571.5 4755,837.5 4775,857.5 v1(4965,857.5) ; v1(4965,1180) 4965,1770 5415,2220 R47.1@5415,2351
  Bottom w5: v1(4965,857.5) v1(4965,1046) v1(4965,1180)
EMMC_D1/I2S0_LRCLK: CON2.22 R46.2 R96.2 | length 4965
  Top w5: CON2.22@3335.14,903.37 3335.14,970.14 3395,1030 3500,1030 3582.5,1112.5 4127.5,1112.5 4177.5,1062.5 v1(4705,1062.5) 5055,1062.5 5085,1092.5 5085,1795 5480,2190 5880,2190 5960,2270 v1(5960,2685) ; R96.2@4705,571.5 v1(4705,855) ; R46.2@5859,2960 v1(5960,2960)
  Bottom w5: v1(4705,855) v1(4705,1062.5) ; v1(5960,2685) v1(5960,2960)
EMMC_D2: CON2.15 R61.2 | length 4973.6
  Top w5: CON2.15@3276.08,761.63 3276.08,531.42 3297.5,510 4095,510 4160,575 4160,860 4192.5,892.5 5072.5,892.5 5155,975 5155,1780 5495,2120 5870,2120 6007.5,2257.5 6007.5,2742.5 5990,2760 R61.2@5859,2760
EMMC_D3: CON2.16 R62.1 | length 3412.3
  Top w5: CON2.16@3276.08,903.37 3276.08,976.08 3365,1065 3490,1065 3575,1150 5015,1150 5055,1190 5055,1810 5465,2220 5600,2220 5615,2235 R62.1@5615,2351
EMMC_D4: CON2.17 R51.2 | length 5016.3
  Top w5: CON2.17@3295.77,761.63 3295.77,529.23 3305,520 4090,520 4150,580 4150,870 4182.5,902.5 5050,902.5 5145,997.5 5145,1790 5485,2130 5860,2130 5990,2260 v1(5990,2730) ; R51.2@5859,2860 v1(5990,2860)
  Bottom w5: v1(5990,2730) v1(5990,2860)
EMMC_D5: CON2.19 R52.1 | length 3928.8
  Top w5: CON2.19@3315.45,761.63 3315.45,544.55 3330,530 4085,530 4140,585 4140,880 4172.5,912.5 5040,912.5 5135,1007.5 5135,1800 5490,2155 v1(5515,2155) ; v1(5515,2240) R52.1@5515,2351
  Bottom w5: v1(5515,2155) v1(5515,2240)
EMMC_D6: CON2.20 R59.2 | length 4255.5
  Top w5: CON2.20@3315.45,903.37 3315.45,985.45 3375,1045 3500,1045 3585,1130 5035,1130 5075,1170 5075,1800 5475,2200 5870,2200 5947.5,2277.5 5947.5,2647.5 5910,2685 5835,2685 5830,2690 5830,2781 R59.2@5859,2810
EMMC_D7/I2S0_DIN: CON2.23 R60.1 R101.2 | length 4176.9
  Top w5: CON2.23@3354.82,761.63 3354.82,580.18 3370,560 v1(4070,560) ; v1(4892.5,449) 4892.5,539 R101.2@4860,571.5 4893.5,605 5150,605 5165,620 5165,1770 5490,2095 v1(5565,2095) ; v1(5565,2240) R60.1@5565,2351
  Bottom w5: v1(4070,560) 4110,560 4205,465 4876.5,465 v1(4892.5,449) ; v1(5565,2095) v1(5565,2240)
EMMC_RST: CON3.35 R65.2 | length 2773
  Top w5: CON3.35@3276.08,2521.87 v1(3276.08,2660) ; R65.2@5859,2660 v1(5885,2660)
  Bottom w5: v1(3276.08,2660) v1(5885,2660)
ETH0_RX+: CON14.3 CON16.8 | length 2032.2
  Top w10: CON14.3@2015.16,5326.55 2015.16,5235 2060,5190.16 2060,4995 2100,4955 2575,4955 2715,5095 2715,5565 2740,5590 3095,5590 3124.37,5560.63 CON16.8@3124.37,5510
ETH0_RX-: CON14.6 CON16.10 | length 1969.1
  Top w10: CON14.6@2134.85,5256.47 2080,5201.63 2080,5005 2110,4975 2200,4975 2565,4975 2695,5105 2695,5580 2725,5610 3105,5610 3144.06,5570.94 CON16.10@3144.06,5510
ETH0_TX+: CON14.1 CON16.2 | length 2067.7
  Top w10: CON14.1@1934.85,5326.55 1934.85,5225 1954.92,5204.92 1954.92,4965.08 2015,4905 2605,4905 2765,5065 2765,5512.5 2800,5547.5 3060,5547.5 3065.31,5542.19 CON16.2@3065.32,5510
ETH0_TX-: CON14.2 CON16.4 | length 1985
  Top w10: CON14.2@1974.22,5256.47 1974.22,4975 2024.22,4925 2595,4925 2745,5075 2745,5522.5 2787.5,5565 3067.5,5565 3085,5547.5 CON16.4@3085,5510
ETH1_RX+: CON18.3 CON21.8 | length 2552.7
  Top w10: CON21.8@4525.63,5511.03 4525.63,5570 4500.63,5595 4325,5595 4285,5555 4285,5265 4625,4925 5620,4925 5710,5015 5710,5190.16 5670.16,5230 CON18.3@5670.16,5331.55
ETH1_RX-: CON18.6 CON21.10 | length 2630.1
  Top w10: CON21.10@4545.32,5511.03 4545.31,5585 4545,5585 4515,5615 4315,5615 4265,5565 4265,5255 4615,4905 5630,4905 5730,5005 5730,5201.63 CON18.6@5789.85,5261.47
ETH1_TX+: CON18.1 CON21.2 | length 2192.5
  Top w10: CON21.2@4466.58,5511.03 4466.57,5543.43 4460,5550 4355,5550 4335,5530 4335,5285 4645,4975 5575,4975 5610,5010 5610,5170 5560,5220 5560,5301.7 CON18.1@5589.85,5331.55
ETH1_TX-: CON18.2 CON21.4 | length 2225.5
  Top w10: CON21.4@4486.26,5511.03 4486.26,5553.74 4470,5570 4345,5570 4315,5540 4315,5275 4635,4955 5585,4955 5629.22,4999.22 CON18.2@5629.22,5261.47